# Altium PCB Copy of RA6M1.PcbDoc
Units mil, origin at the board's own origin, x right, y up, seen from the top; angles counter-clockwise.
Board outline 3150 x 4921 mil, 2 copper layers (Top Layer, Bottom Layer); 73 components, 111 nets, 520 pads, 75 vias.
Unrouted connection lines stored in the file: 143.
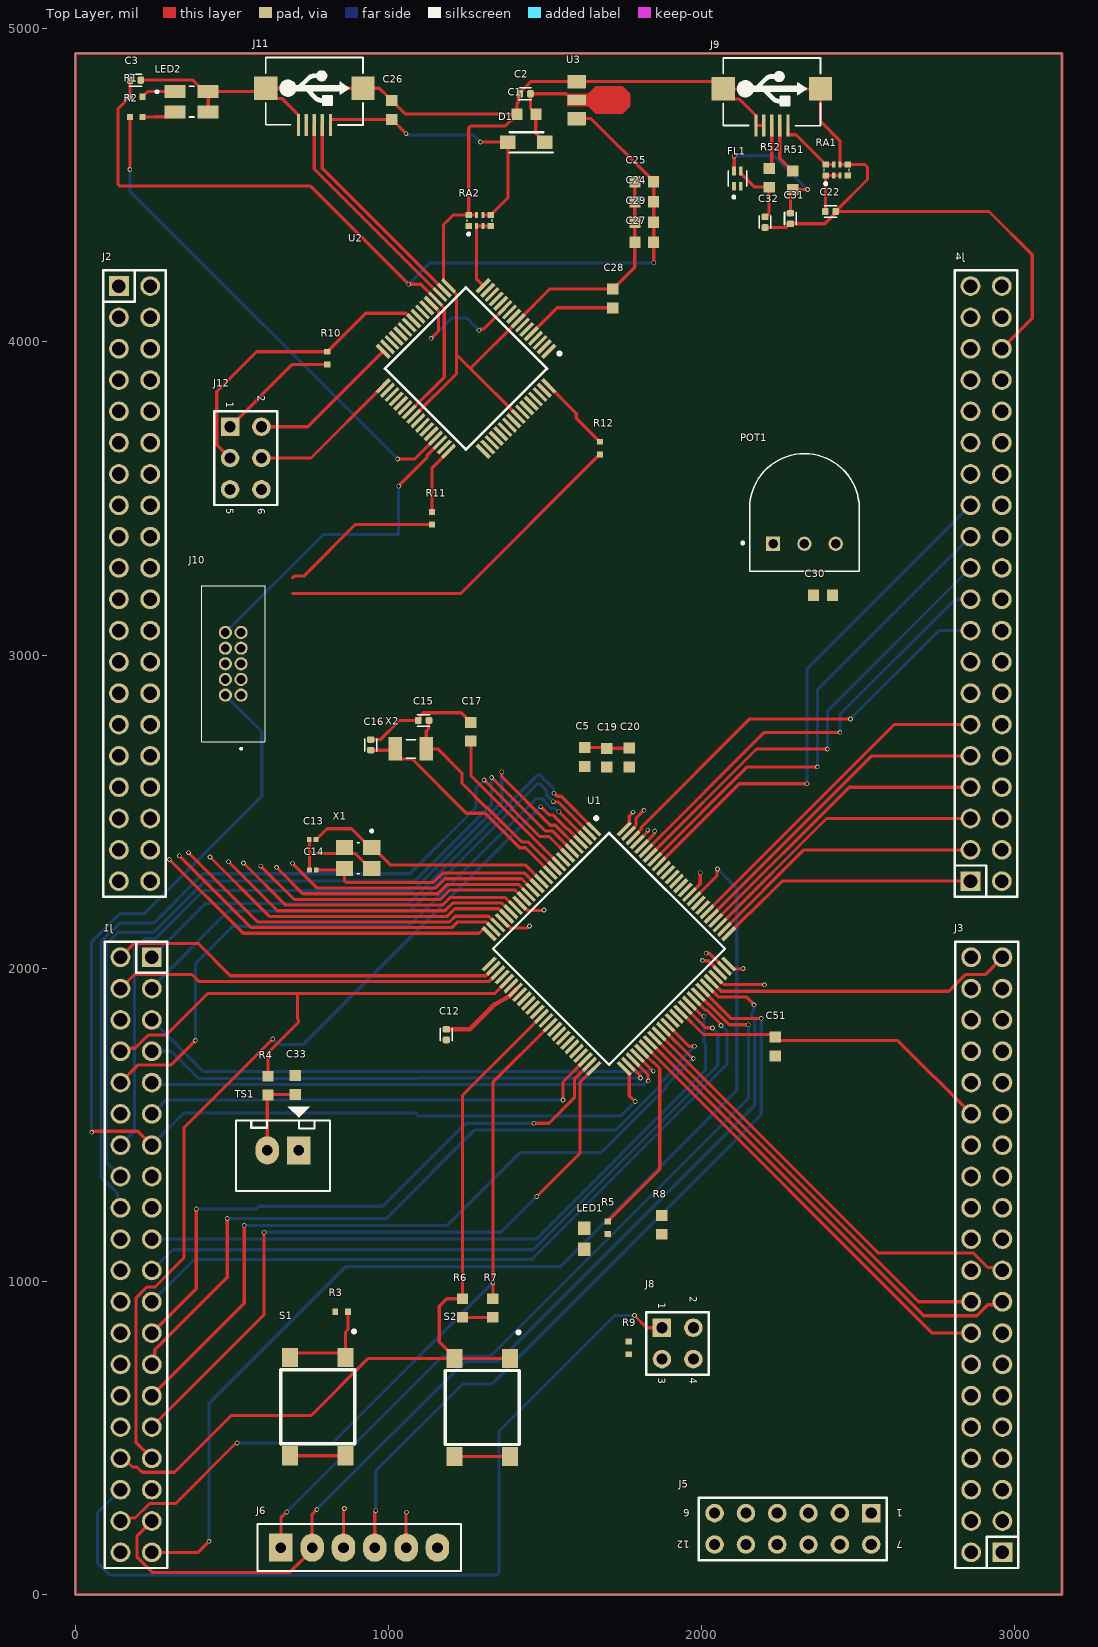
[diagram p0: Top Layer view]
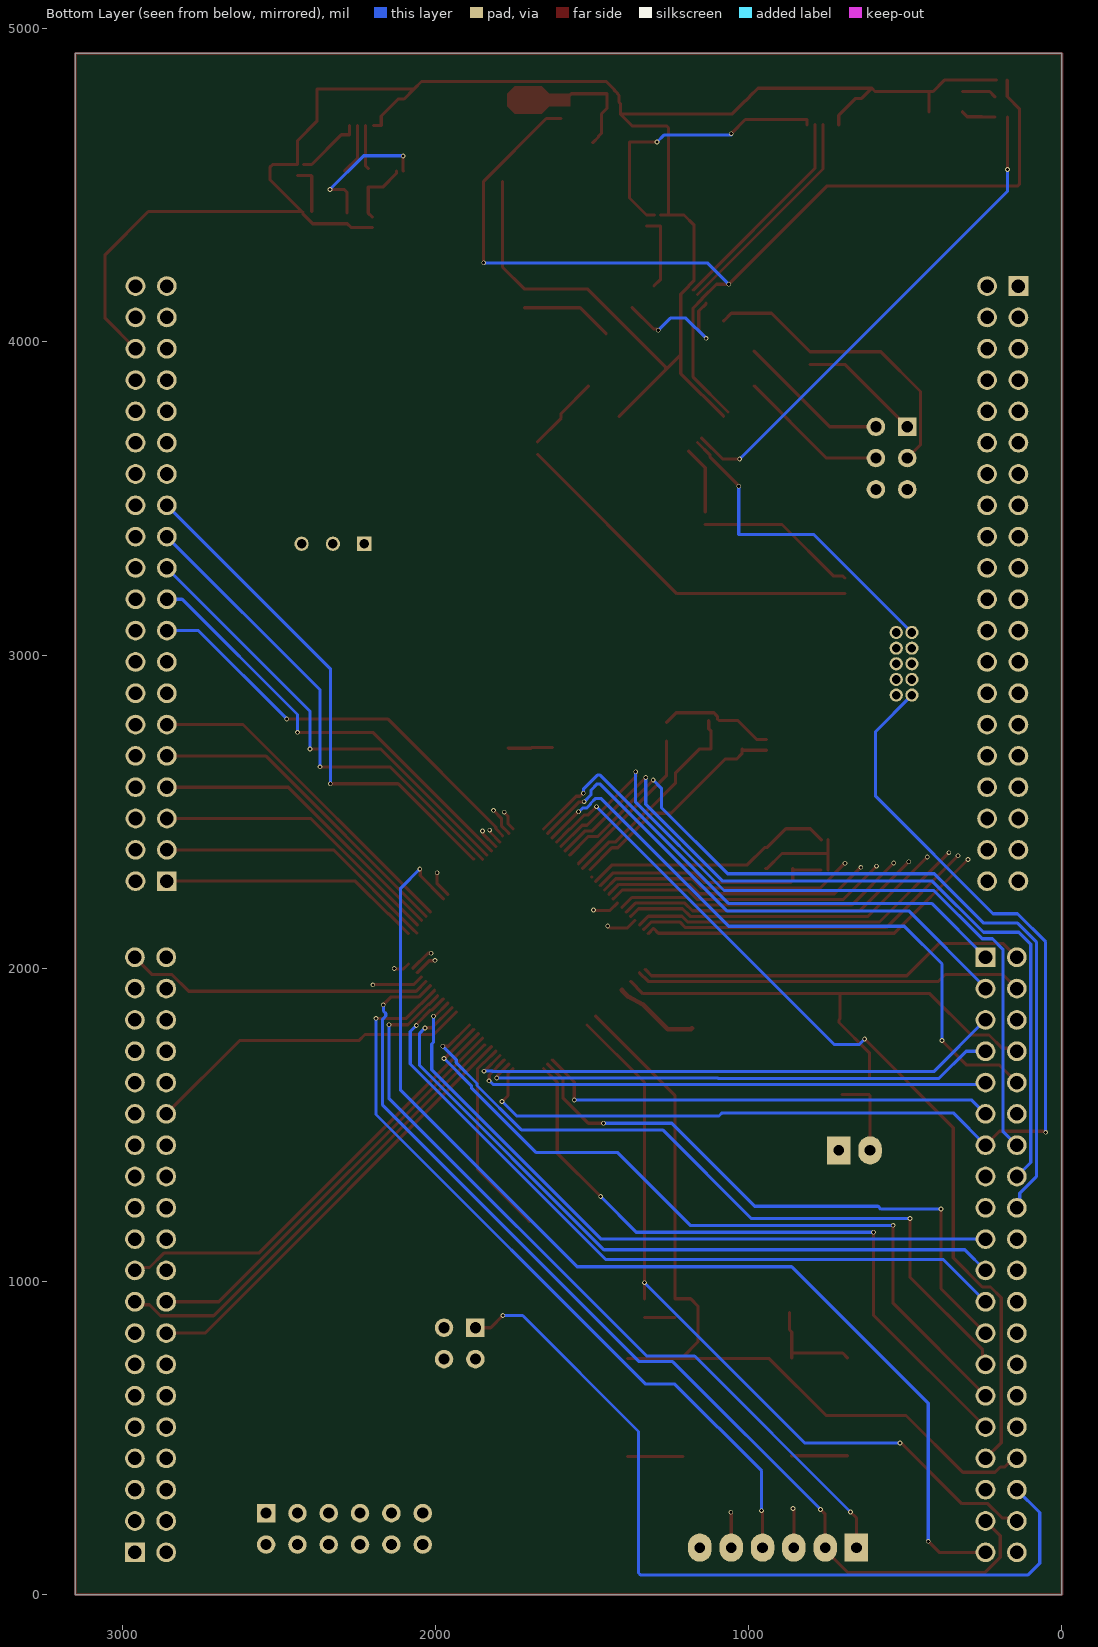
[diagram p1: Bottom Layer view, seen from below]

## Layer stack, top to bottom
Top Solder: solder mask 0.4, Solder Resist, Dk 3.5
Top Layer: signal copper 1.4
Dielectric 1: dielectric 12.6, FR-4, Dk 4.8
Bottom Layer: signal copper 1.4
Bottom Solder: solder mask 0.4, Solder Resist, Dk 3.5

## Board outline
0,0 0,4921 3150,4921 3150,0

## Design rules (kind name [scope] priority, off if disabled: settings)
Clearance [All] p1: gap=8 ignorepadtopadclearanceinfootprint=FALSE
PolygonConnect [All] p1: connectstyle=Relief reliefconductorwidth=10 reliefentries=4 polygonreliefangle="90 Angle" airgapwidth=10
RoomDefinition RA6M1 [InComponentClass('RA6M1')] p1: confinementstyle=ConfineIn formatcopy=TRUE lockcomponents=FALSE outline -1001,-1001 999,-1001 999,-1 -1001,-1
RoutingVias [All] p1: holewidth=28 width=50 viastyle="Through Hole" minholewidth=10 minwidth=15 maxholewidth=15 maxwidth=30
SolderMaskExpansion [All] p1: expansion=4 istentingtop=FALSE
Width [All] p1: maxlimit=30 minlimit=10 preferedwidth=15
30 further rules are at their usual default settings.

## Components (designator, comment, footprint, x,y, rotation, side; value= is the part's Value field where it differs from the comment)
C1 "0.1uF/50V/0603" CAPC1608X90N 1440,4727 r0 top
C2 "1UF/16V/0402" CAPC1005X55N 1436,4792 r180 top
C3 "1UF/16V/0402" CAPC1005X55N 192.22,4835.44 r0 top
C4 "4.7uF/50V/0603" CAPC1608X90N 3602,2530.24 r180 top
C5 "0.1uF/50V/0603" CAPC1608X90N 1627,2674 r270 top
C7 "0.1uF/50V/0603" CAPC1608X90N 3602,2452.05 r180 top
C8 "0.1uF/50V/0603" CAPC1608X90N 3602,2608.42 r180 top
C11 "0.1uF/50V/0603" CAPC1608X90N 3602,2764.8 r180 top
C12 "0.01uF/50V/0402" CAPC1005X55N 1184.47,1787.93 r270 top
C13 "10pF/25V/0201" RESC0603X26N 757.49,2410.4 r0 top
C14 "10pF/25V/0201" RESC0603X26N 758.46,2313.4 r0 top
C15 "12pF/50V/0402" CAPC1005X55N 1112,2791 r180 top
C16 "12pF/50V/0402" CAPC1005X55N 943,2713 r90 top
C17 "0.1uF/50V/0603" CAPC1608X90N 1263,2755 r270 top
C18 "0.1uF/50V/0603" CAPC1608X90N 3602,2686.61 r180 top
C19 "4.7uF/6.3V/0603" CAPC1608X90N 1696,2672 r270 top
C20 "4.7uF/6.3V/0603" CAPC1608X90N 1768,2673 r270 top
C21 "0.1uF/50V/0603" CAPC1608X90N 3602,2139.31 r180 top
C22 "1uF/16V/0402" CAPC1005X55N 2411,4416 r0 top
C23 "0.1uF/50V/0603" CAPC1608X90N 3602,2217.49 r180 top
C24 "0.1uF/50V/0603" CAPC1608X90N 1816.48,4447.08 r0 top
C25 "0.1uF/50V/0603" CAPC1608X90N 1816.48,4511.69 r0 top
C26 "0.1uF/50V/0603" CAPC1608X90N 1010,4740 r270 top
C27 "0.1uF/50V/0603" CAPC1608X90N 1816.48,4317.85 r0 top
C28 "4.7uF6.3V/0603" CAPC1608X90N 1716,4139 r90 top
C29 "0.1uF/50V/0603" CAPC1608X90N 1816.48,4382.46 r0 top
C30 "0.1UF/50V/0603" CAPC1608X90N 2387,3191 r180 top
C31 "47pF/50V/402" CAPC1005X55N 2283,4394 r270 top
C32 "47pF/50V/402" CAPC1005X55N 2202,4382 r270 top
C33 "18pF/50V/0603" CAPC1608X90N 701.98,1627.17 r270 top
C50 "0.1uF/50V/0603" CAPC1608X90N 3602,2295.68 r180 top
C51 "0.1uF/50V/0603" CAPC1608X90N 2234,1750 r90 top
C53 "0.1uF/50V/0603" CAPC1608X90N 3602,2373.87 r180 top
D1 "40V/1A" SODFL3616X98N 1440,4637 r180 top
FL1 "DLP11SN201HL2L" FIL_DLP11SN201HL2L 2114,4521 r90 top
J1 "JP 2x20 2.54" "JP 2x20 DT"#1 194,1085 r270 top
J2 "JP 2x20 2.54" "JP 2x20 DT"#2 189,3228 r270 top
J3 "JP 2x20 2.54" "JP 2x20 DT"#2 2910,1085 r90 top
J4 "JP 2x20 2.54" "JP 2x20 DT"#1 2908,3228 r90 top
J5 "Header 6X2A" HDR2X6_CEN 2541,260 r180 top
J6 "JP6" jam6 656,150 r180 top value="Connector 6"
J8 "JP2x2" HDR2X2 1873,852 r270 top
J9 "USB Micro 5p SMD" "USB Micro 5p SMD" 2223.59,4691 r0 top
J10 "3220-10-0100-00" 322010010000 529,2872 r90 top
J11 "USB Micro 5p SMD" "USB Micro 5p SMD" 762.82,4693 r0 top
J12 "HEAD 3x2" HDR2X3 494,3729 r270 top value="Connector 3x2"
LED1 "LED/0603" 0603 1625,1135.72 r270 top
LED2 "LED/1210" LED_597-7701-507F 371,4767 r0 top
POT1 "10K0" TRIM_3352T-1-103LF 2327.72,3468.05 r0 top
R1 "470R/0.5%/0402" RES_ERA2AED472X 194.15,4782.52 r0 top
R2 "1.5K/0.5%/0402" RES_ERA2AED472X 194.15,4717.52 r0 top
R3 "47K0/1%/0402" RES_ERA2AED472X 849.84,903 r180 top
R4 "560R0/1%/0603" RESC1508X55N 615,1625.15 r270 top
R5 "470R/0.5%/0402" RES_ERA2AED472X 1700,1171.72 r270 top
R6 "10K/1%/0603" RESC1508X55N 1236,914.92 r270 top
R7 "10K/1%/0603" RESC1508X55N 1333,914.92 r270 top
R8 "10K2/1%/0603" RESC1508X55N 1872,1180.72 r90 top
R9 "1K50/0.5%/0402" RES_ERA2AED472X 1767,787.84 r270 top
R10 "4.7K/0.5%/0402" RES_ERA2AED472X 804,3948.16 r270 top
R11 "150R/1%/0402" RES_ERA2AED472X 1139,3437 r270 top
R12 "150R/1%/0402" RES_ERA2AED472X 1675,3661 r90 top
R51 "27R0/1%/0603" RESC1508X55N 2291,4516 r90 top
R52 "27R0/1%/0603" RESC1508X55N 2215,4523.55 r90 top
RA1 "30K0/0402" EXB28V510JX 2431.16,4548.28 r0 top
RA2 "30K0/0402" EXB28V510JX 1291.04,4387.28 r0 top
S1 "Switch" PTS645(SMT) 774,600 r270 top
S2 "Switch" PTS645(SMT) 1299,597 r270 top
TS1 "CON" CON2 712.79,1418.5 r180 top
U1 "R7FA6M1AD3CFP#AA0" QFP50P1600X1600X170-100N 1703.9,2062.07 r315 top
U2 "R7FS124773A01CFM#AA1" QFP50P1200X1200X170-64N 1247,3914.71 r225 top
U3 "AP7215-33YG-13" SOT150P400X160-3N 1671,4772 r270 top
X1 "12MHZ" XTAL_ABM8G-12.000MHZ-B4Y-T 902.69,2351.54 r270 top
X2 "32.768KHZ" XTAL_ABS07-32.768KHZ-T 1071,2700.48 r180 top

## Footprints (in the part's own frame and the unit in brackets; to place one, negate y for a bottom-side part, rotate by r counter-clockwise, add the part's x,y. Pads: shape width x height; smd on the part's side, far side on the other; paste and mask are expansions set on the pad)
0603 [mm]
  rect 1.1x1 smd: 1(-0.85,0) 2(0.85,0)
  body extent -0.8,-0.38 0.8,0.42, height 0.8
322010010000 [mm]
  round 1.07 hole 0.7: 1(0,0) 2(0,1.27) 3(1.27,0) 4(1.27,1.27) 5(2.54,0) 6(2.54,1.27) 7(3.81,0) 8(3.81,1.27) 9(5.08,0) 10(5.08,1.27)
  silkscreen extent -4.4,-1.91 8.86,3.18, body extent -3.78,-1.91 8.87,3.19, height 5.7
CAPC1005X55N [mm]
  rrect53% 0.54x0.6 smd: 1(-0.43,0) 2(0.43,0)
  silkscreen extent -0.5,-0.48 0.5,0.48, body extent -0.5,-0.25 0.5,0.25, height 0.55
CAPC1608X90N [mm]
  rect 0.89x0.93 smd: 1(-0.77,0) 2(0.762,0)
  body extent -0.8,-0.42 0.8,0.38, height 0.9
CON2 [mil]
  rect 75x90 hole 34: 1(0,0)
  oval 75x90 hole 34: 2(100,0)
  silkscreen extent -100,-140 200,130, body extent -95,-93 196,133, height 281
EXB28V510JX [mm]
  rect 0.525x0.5 smd: 1(-0.888,-0.45) 4(0.888,-0.45) 5(0.888,0.45) 8(-0.888,0.45)
  rect 0.25x0.5 smd: 2(-0.25,-0.45) 3(0.25,-0.45) 6(0.25,0.45) 7(-0.25,0.45)
  silkscreen extent -1,-1.2 1,0.1, body extent -1,-0.5 1,0.5, height 0.36
FIL_DLP11SN201HL2L [mm]
  rect 0.7x0.3 smd: 1(-0.625,0.275) 2(0.625,0.275) 3(0.625,-0.275) 4(-0.625,-0.275)
  silkscreen extent -1.6,-0.74 0.63,0.74, body extent -0.63,-0.5 0.62,0.5, height 0.92
HDR2X2 [mm] "Connector; Header; 2x2 Position"
  rect 1.5x1.5 hole 0.9: 1(0,0)
  round 1.5 hole 0.9: 2(0,2.54) 3(2.54,0) 4(2.54,2.54)
  silkscreen extent -1.27,-1.27 3.81,3.81, body extent -1.27,-1.26 3.81,3.82, height 8.77
HDR2X3 [mm] "Connector; Header; 3x2 Position"
  rect 1.5x1.5 hole 0.9: 1(0,0)
  round 1.5 hole 0.9: 2(0,2.54) 3(2.54,0) 4(2.54,2.54) 5(5.08,0) 6(5.08,2.54)
  silkscreen extent -1.27,-1.27 6.35,3.81, body extent -1.27,-1.27 6.35,3.81, height 8.77
HDR2X6_CEN [mm] "Connector; Header; 6x2 Position"
  rect 1.5x1.5 hole 0.9: 1(0,0)
  round 1.5 hole 0.9: 2(2.54,0) 3(5.08,0) 4(7.62,0) 5(10.16,0) 6(12.7,0) 7(0,2.54) 8(2.54,2.54) 9(5.08,2.54) 10(7.62,2.54) 11(10.16,2.54) 12(12.7,2.54)
  silkscreen extent -1.27,-1.27 13.97,3.81, body extent -1.27,-1.27 13.97,3.81, height 1.5
jam6 [mil]
  rect 75x90 hole 34: 1(0,0)
  oval 75x90 hole 34: 2(-100,0) 3(-200,0) 4(-300,0) 5(-400,0) 6(-500,0)
  silkscreen extent -575,-75 75,75, body extent -550,-51 50,49, height 704
"JP 2x20 DT"#1 [mm] "40 pins, dual pin, straight, gold plating"
  rect 1.6x1.6 hole 1.1: 1(-24.13,1.27)
  round 1.6 hole 1.1: 2(-21.59,1.27) 3(-19.05,1.27) 4(-16.51,1.27) 5(-13.97,1.27) 6(-11.43,1.27) 7(-8.89,1.27) 8(-6.35,1.27) 9(-3.81,1.27) 10(-1.27,1.27) 11(1.27,1.27) 12(3.81,1.27) 13(6.35,1.27) 14(8.89,1.27) 15(11.43,1.27) 16(13.97,1.27) 17(16.51,1.27) 18(19.05,1.27) 19(21.59,1.27) 20(24.13,1.27) 21(24.13,-1.27) 22(21.59,-1.27) 23(19.05,-1.27) 24(16.51,-1.27) 25(13.97,-1.27) 26(11.43,-1.27) 27(8.89,-1.27) 28(6.35,-1.27) 29(3.81,-1.27) 30(1.27,-1.27) 31(-1.27,-1.27) 32(-3.81,-1.27) 33(-6.35,-1.27) 34(-8.89,-1.27) 35(-11.43,-1.27) 36(-13.97,-1.27) 37(-16.51,-1.27) 38(-19.05,-1.27) 39(-21.59,-1.27) 40(-24.13,-1.27)
  silkscreen extent -25.4,-2.54 25.4,2.54, body extent -25.4,-2.54 25.4,2.54, height 5.55
"JP 2x20 DT"#2 [mm] "40 pins, dual pin, straight, gold plating"
  rect 1.6x1.6 hole 1.1: 1(-24.13,-1.27)
  round 1.6 hole 1.1: 2(-21.59,-1.27) 3(-19.05,-1.27) 4(-16.51,-1.27) 5(-13.97,-1.27) 6(-11.43,-1.27) 7(-8.89,-1.27) 8(-6.35,-1.27) 9(-3.81,-1.27) 10(-1.27,-1.27) 11(1.27,-1.27) 12(3.81,-1.27) 13(6.35,-1.27) 14(8.89,-1.27) 15(11.43,-1.27) 16(13.97,-1.27) 17(16.51,-1.27) 18(19.05,-1.27) 19(21.59,-1.27) 20(24.13,-1.27) 21(24.13,1.27) 22(21.59,1.27) 23(19.05,1.27) 24(16.51,1.27) 25(13.97,1.27) 26(11.43,1.27) 27(8.89,1.27) 28(6.35,1.27) 29(3.81,1.27) 30(1.27,1.27) 31(-1.27,1.27) 32(-3.81,1.27) 33(-6.35,1.27) 34(-8.89,1.27) 35(-11.43,1.27) 36(-13.97,1.27) 37(-16.51,1.27) 38(-19.05,1.27) 39(-21.59,1.27) 40(-24.13,1.27)
  silkscreen extent -25.4,-2.54 25.4,2.54, body extent -25.4,-2.54 25.4,2.54, height 8.55
LED_597-7701-507F [mm]
  rect 1.7x1.05 smd: 1(-1.35,0.825) 2(1.35,0.825) 3(-1.35,-0.825) 4(1.35,-0.825)
  silkscreen extent -2.9,-1.25 0.2,1.25, body extent -1.6,-1.35 1.6,1.35, height 0.9
PTS645(SMT) [mm]
  rect 1.55x1.3 smd: 1(-3.975,2.25) 2(3.975,2.25) 3(-3.975,-2.25) 4(3.975,-2.25)
  silkscreen extent -6.23,-3 3,3.06, body extent -4.5,-3 4.5,3, height 4.3
QFP50P1200X1200X170-64N [mm]
  rect 1.475x0.3 smd: 1(-5.738,3.75) 2(-5.738,3.25) 3(-5.738,2.75) 4(-5.738,2.25) 5(-5.738,1.75) 6(-5.738,1.25) 7(-5.738,0.75) 8(-5.738,0.25) 9(-5.738,-0.25) 10(-5.738,-0.75) 11(-5.738,-1.25) 12(-5.738,-1.75) 13(-5.738,-2.25) 14(-5.738,-2.75) 15(-5.738,-3.25) 16(-5.738,-3.75) 33(5.738,-3.75) 34(5.738,-3.25) 35(5.738,-2.75) 36(5.738,-2.25) 37(5.738,-1.75) 38(5.738,-1.25) 39(5.738,-0.75) 40(5.738,-0.25) 41(5.738,0.25) 42(5.738,0.75) 43(5.738,1.25) 44(5.738,1.75) 45(5.738,2.25) 46(5.738,2.75) 47(5.738,3.25) 48(5.738,3.75)
  rect 0.3x1.475 smd: 17(-3.75,-5.738) 18(-3.25,-5.738) 19(-2.75,-5.738) 20(-2.25,-5.738) 21(-1.75,-5.738) 22(-1.25,-5.738) 23(-0.75,-5.738) 24(-0.25,-5.738) 25(0.25,-5.738) 26(0.75,-5.738) 27(1.25,-5.738) 28(1.75,-5.738) 29(2.25,-5.738) 30(2.75,-5.738) 31(3.25,-5.738) 32(3.75,-5.738) 49(3.75,5.738) 50(3.25,5.738) 51(2.75,5.738) 52(2.25,5.738) 53(1.75,5.738) 54(1.25,5.738) 55(0.75,5.738) 56(0.25,5.738) 57(-0.25,5.738) 58(-0.75,5.738) 59(-1.25,5.738) 60(-1.75,5.738) 61(-2.25,5.738) 62(-2.75,5.738) 63(-3.25,5.738) 64(-3.75,5.738)
  silkscreen extent -6.35,-4.65 4.65,4.65, body extent -6,-6 6,6, height 1.7
QFP50P1600X1600X170-100N [mm]
  rect 1.475x0.3 smd: 1(-7.738,6) 2(-7.738,5.5) 3(-7.738,5) 4(-7.738,4.5) 5(-7.738,4) 6(-7.738,3.5) 7(-7.738,3) 8(-7.738,2.5) 9(-7.738,2) 10(-7.738,1.5) 11(-7.738,1) 12(-7.738,0.5) 13(-7.738,0) 14(-7.738,-0.5) 15(-7.738,-1) 16(-7.738,-1.5) 17(-7.738,-2) 18(-7.738,-2.5) 19(-7.738,-3) 20(-7.738,-3.5) 21(-7.738,-4) 22(-7.738,-4.5) 23(-7.738,-5) 24(-7.738,-5.5) 25(-7.738,-6) 51(7.738,-6) 52(7.738,-5.5) 53(7.738,-5) 54(7.738,-4.5) 55(7.738,-4) 56(7.738,-3.5) 57(7.738,-3) 58(7.738,-2.5) 59(7.738,-2) 60(7.738,-1.5) 61(7.738,-1) 62(7.738,-0.5) 63(7.738,0) 64(7.738,0.5) 65(7.738,1) 66(7.738,1.5) 67(7.738,2) 68(7.738,2.5) 69(7.738,3) 70(7.738,3.5) 71(7.738,4) 72(7.738,4.5) 73(7.738,5) 74(7.738,5.5) 75(7.738,6)
  rect 0.3x1.475 smd: 26(-6,-7.738) 27(-5.5,-7.738) 28(-5,-7.738) 29(-4.5,-7.738) 30(-4,-7.738) 31(-3.5,-7.738) 32(-3,-7.738) 33(-2.5,-7.738) 34(-2,-7.738) 35(-1.5,-7.738) 36(-1,-7.738) 37(-0.5,-7.738) 38(0,-7.738) 39(0.5,-7.738) 40(1,-7.738) 41(1.5,-7.738) 42(2,-7.738) 43(2.5,-7.738) 44(3,-7.738) 45(3.5,-7.738) 46(4,-7.738) 47(4.5,-7.738) 48(5,-7.738) 49(5.5,-7.738) 50(6,-7.738) 76(6,7.738) 77(5.5,7.738) 78(5,7.738) 79(4.5,7.738) 80(4,7.738) 81(3.5,7.738) 82(3,7.738) 83(2.5,7.738) 84(2,7.738) 85(1.5,7.738) 86(1,7.738) 87(0.5,7.738) 88(0,7.738) 89(-0.5,7.738) 90(-1,7.738) 91(-1.5,7.738) 92(-2,7.738) 93(-2.5,7.738) 94(-3,7.738) 95(-3.5,7.738) 96(-4,7.738) 97(-4.5,7.738) 98(-5,7.738) 99(-5.5,7.738) 100(-6,7.738)
  silkscreen extent -8.35,-6.65 6.65,6.87, body extent -8,-8 8,8, height 1.7
RES_ERA2AED472X [mm]
  rect 0.475x0.5 smd: 1(-0.512,0) 2(0.512,0)
  body extent -0.5,-0.25 0.5,0.25, height 0.35
RESC0603X26N [mm]
  rrect25% 0.38x0.4 smd: 1(-0.28,0)
  rect 0.38x0.4 smd: 2(0.28,0)
  body extent -0.3,-0.15 0.3,0.15, height 0.32
RESC1508X55N [mm]
  rect 0.87x0.93 smd: 1(-0.755,0) 2(0.755,0)
  body extent -0.77,-0.4 0.78,0.4, height 0.55
SODFL3616X98N [mm]
  rect 1.24x1.12 smd: 1(-1.5,0) 2(1.5,0)
  silkscreen extent -2.12,-0.82 1.35,0.82, body extent -1.8,-0.82 1.8,0.83, height 0.98
SOT150P400X160-3N [mm]
  rrect3% 1.1x1.5 smd paste-2 mask+0: 1(-1.5,-1.8) 3(1.5,-1.8)
  rrect3% 0.8x1.5 smd paste-2 mask+0: 2(0,-1.8)
  Top Layer region: 1.1,1.95 1.1,-0.25 0.5,-0.85 0.5,-2.55 -0.5,-2.55 -0.5,-0.85 -1.1,-0.25 -1.1,1.95 -0.5,2.55 0.5,2.55
  body extent -2.25,-2.3 2.25,1.79, height 1.6
TRIM_3352T-1-103LF [mm]
  rect 1.16x1.16 hole 0.76: 1(-2.54,-2.87)
  round 1.16 hole 0.76: 2(0,-2.87) 3(2.54,-2.87)
  silkscreen extent -5.1,-5.08 4.44,4.44, body extent -4.44,-5.08 4.44,4.44, height 4.32
"USB Micro 5p SMD" [mil]
  rect 10x70 smd: 1(51.18,0) 2(25.59,0) 3(0,0) 4(-25.59,0) 5(-50,0)
  rect 74.8x74.8 smd: 5(-155.51,116.84) 5(155.51,116.84)
  silkscreen extent -155,-1 155,215, body extent -157,5 158,218, height 107
XTAL_ABM8G-12.000MHZ-B4Y-T [mm]
  rect 1.2x1.4 smd: 1(-0.85,1.1) 2(-0.85,-1.1) 3(0.85,-1.1) 4(0.85,1.1)
  silkscreen extent -2.3,-0.08 1.25,1.2, body extent -1.6,-1.24 1.6,1.24, height 0.99
XTAL_ABS07-32.768KHZ-T [mm]
  rect 1.1x1.9 smd: 1(-1.25,0) 2(1.25,0)
  silkscreen extent -0.38,-0.75 0.38,0.75, body extent -1.6,-0.75 1.6,0.75, height 0.89

## Part data
C1 C4 C5 C7 C8 C11 C17 C18 C19 C20 C21 C23 C24 C25 C26 C27 C28 C29 C30 C33 C50 C51 C53: library part CL10B104KB8NNNC, "0.1ÂµF Â±10% 50V Ceramic Capacitor X7R 0603 _1608 Metric_", Package="0603 Samsung", Availability=Unavailable, MF="Samsung Electro-Mechanics", MP=CL10B104KB8NNNC, Price=None, SnapEDA_Link=https://www.snapeda.com/parts/CL10B104KB8NNNC/Samsung%20Electro-Mechanics/view-part/3598309/?ref=snap
C2 C3 C12 C15 C16 C22 C31 C32: library part CL05A105KO5NNNC, "1ÂµF Â±10% 16V Ceramic Capacitor X5R 0402 (1005 Metric)", Package="0402 Samsung", Availability=Good, Check_prices=https://www.snapeda.com/parts/CL05A105KO5NNNC/Samsung%20Electro-Mechanics/view-part/3598151/?ref=eda, MF="Samsung Electro-Mechanics", MP=CL05A105KO5NNNC, Price=None, Purchase-URL=https://pricing.snapeda.com/search/part/CL05A105KO5NNNC/?ref=eda, SnapEDA_Link=https://www.snapeda.com/parts/CL05A105KO5NNNC/Samsung%20Electro-Mechanics/view-part/3598151/?ref=snap
C13 C14: library part RESC0603X26N, "TU0201", Package="0603 Samsung", Availability=Unavailable, MF="Samsung Electro-Mechanics", MP=CL10B104KB8NNNC, Price=None, SnapEDA_Link=https://www.snapeda.com/parts/CL10B104KB8NNNC/Samsung%20Electro-Mechanics/view-part/3598309/?ref=snap
D1: library part MBR140SFT1G, "Diode Schottky 40V 1A SOD-123FL ON Semiconductor MBR140SFT1G Schottky Diode, 1A, 40V, 2-Pin SOD-123FL", Manufacturer_Name=onsemi, Mouser Part Number=863-MBR140SFT1G, Arrow Part Number=MBR140SFT1G, Arrow Price/Stock=https://www.arrow.com/en/products/mbr140sft1g/on-semiconductor?region=nac, Datasheet Link=http://www.onsemi.com/pub/Collateral/MBR140SFT1-D.PDF, Geometry.Height=0.98mm, Manufacturer_Part_Number=MBR140SFT1G, Mouser Price/Stock=https://www.mouser.co.uk/ProductDetail/onsemi/MBR140SFT1G?qs=3JMERSakebrc0eIUjXPasA%3D%3D
FL1: "2 Line Common Mode Choke Surface Mount 200 Ohms @ 100MHz 110mA DCR 3.88Ohm", Package="1210 Murata", Availability=Unavailable, DigiKey-Purchase-URL=https://snapeda.com/shop?store=DigiKey&id=4300877, MF=Murata, MP=DLP11SN201HL2L, Price=None, SnapEDA_Link=https://www.snapeda.com/parts/DLP11SN201HL2L/Murata/view-part/4300877/?ref=snap
J1 J2 J3 J4: library part "JP 2x20 2.54 Duc Thang", "Cắm", Chung_Loai=Cắm, Don_Vi=Con, Ma_Hang=MH002686, Ten_Linh_Kien="Jump Đôi Đực 2.54MM 2x40P Thẳng 11MM"
J5: "Header, 6-Pin, Dual row", LatestRevisionDate=17-Jul-2002, LatestRevisionNote="Re-released for DXP Platform.", Publisher="Altium Limited"
J6: library part "jam 6", "jam 6"
J9 J11: "USB Type B", Ma_Hang=MH001020, Ten="MicroUSB MK5P SMD"
J10: "Conn Shrouded Header (4 Sides) HDR 10 POS 1.27mm Solder ST Thru-Hole", Manufacturer_Name="CNC Tech", Arrow Part Number=3220-10-0100-00, Arrow Price/Stock=https://www.arrow.com/en/products/3220-10-0100-00/cnc-tech-llc?region=nac, Datasheet Link=https://datasheet.datasheetarchive.com/originals/dk/DKDS-7/133059.pdf, Geometry.Height=5.6mm, Manufacturer_Part_Number=3220-10-0100-00
J12: library part JP3x2, "Connector 3x2"
LED1: library part LTST-C191KRKT, "http://octopart.com/ltst-c190krkt-lite-on-549893", Package=None, Availability=Unavailable, MP=LTST-C191KRKT, Price=None
LED2: library part 598-8610-207F, "Standard LEDs - SMD Red/Green WC 80/50mcd 645/570nm", Manufacturer_Name=Dialight, Mouser Part Number=645-598-8610-207F, Arrow Part Number=598-8610-207F, Arrow Price/Stock=https://www.arrow.com/en/products/598-8610-207f/dialight?region=nac, Datasheet Link=https://media.digikey.com/pdf/Data%20Sheets/Dialight%20PDFs/598%20Series%201210%20Pkg%20Bi-Color.pdf, Geometry.Height=0.8mm, Manufacturer_Part_Number=598-8610-207F, Mouser Price/Stock=https://www.mouser.co.uk/ProductDetail/Dialight/598-8610-207F?qs=7JStj%2FjQ2SFuCjosqwklHQ%3D%3D
POT1: library part 3352T-1-103LF, "10 kOhms 0.5W, 1/2W Through Hole Thumbwheel Potentiometer Top Adjustment", Package="3352T-3 Bourns", Availability="In Stock", Check_prices=https://www.snapeda.com/parts/3352T-1-103LF/Bourns/view-part/?ref=eda, MF=Bourns, MP=3352T-1-103LF, Price=None, Purchase-URL=https://pricing.snapeda.com/search/part/3352T-1-103LF/?ref=eda, SnapEDA_Link=https://www.snapeda.com/parts/3352T-1-103LF/Bourns/view-part/?ref=snap
R1 R2 R3 R5 R9 R10 R11 R12: library part ERA2AED472X, "Res Thin Film 0402 4.7K Ohm 0.5% 0.063W(1/16W) 25ppm/C Molded SMD Automotive Punched T/R", Package="1005-2 Panasonic", Availability="In Stock", Check_prices=https://www.snapeda.com/parts/ERA-2AED472X/Panasonic+Electronic+Components/view-part/?ref=eda, MF="Panasonic Electronic", MP=ERA-2AED472X, Price=None, Purchase-URL=https://pricing.snapeda.com/search/part/ERA-2AED472X/?ref=eda, SnapEDA_Link=https://www.snapeda.com/parts/ERA-2AED472X/Panasonic+Electronic+Components/view-part/?ref=snap
R4 R6 R7 R8 R51 R52: library part RMCF0603JT27R0, Package=None, Availability=Unavailable, MP=RMCF0603JT27R0, Price=None
RA1 RA2: library part EXB28V303JX, "Resistor Networks & Arrays Resistor ArrayChip 0804 4 elements", Manufacturer_Name=Panasonic, Datasheet Link=https://industrial.panasonic.com/cdbs/www-data/pdf/AOC0000/AOC0000C14.pdf, Geometry.Height=0mm, Manufacturer_Part_Number=EXB28V303JX
S1 S2: library part PTS645SM43SMTR92LFS, "C & K COMPONENTS - PTS645SM43SMTR92LFS - SWITCH, SPST, 0.05A, 12VDC, SMD, 4.3MM", Manufacturer_Name="C & K COMPONENTS", Mouser Part Number=611-PTS645SM43SMTR92, Arrow Part Number=PTS645SM43SMTR92LFS, Arrow Price/Stock=https://www.arrow.com/en/products/pts645sm43smtr92lfs/ck, Datasheet Link=http://www.farnell.com/datasheets/1914518.pdf, Manufacturer_Part_Number=PTS645SM43SMTR92LFS, Mouser Price/Stock=https://www.mouser.co.uk/ProductDetail/CK/PTS645SM43SMTR92LFS?qs=FESYatJ8odKPktxv6ncfWg%3D%3D
TS1: library part Con2, "connector 2"
U1: "ARM Cortex-M4 RA6M1 Microcontroller IC 32-Bit 120MHz 512KB (512K x 8) FLASH 100-LFQFP (14x14)", Manufacturer_Name="Renesas Electronics", Mouser Part Number=968-7FA6M1AD3CFP#AA0, Datasheet Link=https://www.renesas.com/in/en/document/dst/renesas-ra6m1-group-datasheet, Geometry.Height=1.7mm, Manufacturer_Part_Number=R7FA6M1AD3CFP#AA0, Mouser Price/Stock=https://www.mouser.co.uk/ProductDetail/Renesas-Electronics/R7FA6M1AD3CFPAA0?qs=d0WKAl%252BL4KaRUVVllxsS6w%3D%3D
U2: "S124", Manufacturer_Name="Renesas Electronics", Mouser Part Number=968-124773A01CFM#AA1, Datasheet Link=https://www.renesas.com/en-us/doc/products/renesas-synergy/doc/r01ds0264eu0130-synergy-s124.pdf, Geometry.Height=1.7mm, Manufacturer_Part_Number=R7FS124773A01CFM#AA1, Mouser Price/Stock=https://www.mouser.co.uk/ProductDetail/Renesas-Electronics/R7FS124773A01CFMAA1?qs=wUXugUrL1qwGPed2E2%2FoEA%3D%3D
U3: "Linear Voltage Regulator IC 1 Output 600mA SOT-89-3", Package="SOT-89-3 Diodes Inc.", Availability=Unavailable, MF="Diodes Inc.", MP=AP7215-33YG-13, Price=None, SnapEDA_Link=https://www.snapeda.com/parts/AP7215-33YG-13/Diodes%20Inc./view-part/269921/?ref=snap
X1: library part ABM8G-12.000MHZ-B4Y-T, "12 MHz Â±30ppm Crystal 10pF 120 Ohms 4-SMD, No Lead", Package="SMD-4 Abracon", Availability="In Stock", Check_prices=https://www.snapeda.com/parts/ABM8G-12.000MHZ-B4Y-T/Abracon+LLC/view-part/?ref=eda, MF=Abracon, MP=ABM8G-12.000MHZ-B4Y-T, Price=None, Purchase-URL=https://pricing.snapeda.com/search/part/ABM8G-12.000MHZ-B4Y-T/?ref=eda, SnapEDA_Link=https://www.snapeda.com/parts/ABM8G-12.000MHZ-B4Y-T/Abracon+LLC/view-part/?ref=snap
X2: library part ABS07-32.768KHZ-T, "32.768 kHz Â±20ppm Crystal 12.5pF 70 kOhms 2-SMD, No Lead", Package="SMD-2 Abracon LLC", Availability="In Stock", Check_prices=https://www.snapeda.com/parts/ABS07-32.768KHZ-T/Abracon+LLC/view-part/?ref=eda, MF=Abracon, MP=ABS07-32.768KHZ-T, Price=None, Purchase-URL=https://pricing.snapeda.com/search/part/ABS07-32.768KHZ-T/?ref=eda, SnapEDA_Link=https://www.snapeda.com/parts/ABS07-32.768KHZ-T/Abracon+LLC/view-part/?ref=snap

## Via types
v1: diameter 15, hole 10, Top Layer to Bottom Layer, 75 vias

## Nets (pads, with @x,y where several pads share a name; then routed paths per layer and width w, separated by ;. In a path a pad name is that pad's centre, name@x,y a point inside that pad or via, vN(x,y) a via of type N, cw(c..) or ccw(c..) an arc to the next point about the centre after c; other vN are vias at no path point)
3V3: C3.1 C5.2 C19.2 C20.2 C24.2 C25.2 C27.2 C29.2 J2.15 J5.12 J6.6 J10.1 J12.1 POT1.1 R1.1 R10.2 U1.8 U2.20 U2.39 U3.3 | length 3725.6
  Top Layer w10: C3.1 174.64,4834.79 174.64,4783.17 R1.1 173.99,4782.03 136,4744.04 136,4502.86 141.86,4497 751,4497 v1(1064,4184) 1102.98,4184 U2.20 1149.9,4135.98 1177.77,4108.11 1177.77,3887.23 U2.39 ; J12.1 693,3928 R10.2 ; U3.3 1646.02,4712.94 1846.48,4512.48 C25.2 C24.2 C29.2 C27.2 v1(1846.48,4252.52)
  Bottom Layer w10: v1(1064,4184) 1132,4252 v1@1846.48,4252
3V3MCU: C4.2 C7.2 C8.2 C11.2 C18.2 C21.2 C23.2 C50.2 C53.2 J1.8 J1.38 J2.22 J2.25 J2.36 J4.14 J4.19 R3.2 R6.2 R7.2 R8.2 U1.15 U1.29 U1.46 U1.62 U1.82 U1.87 U1.88 U1.91 U2.56 | length 925
  Top Layer w10: v1(693,2335.2) 772.61,2255.59 1149.87,2255.59 1179.96,2285.67 1424.62,2285.67 U1.15 ; R6.2 R7.2
+5V_JUSB: C26.2 D1.2 J11.1 RA2.5 RA2.6 | length 892.4
  Top Layer w10: J11.1 814,4710 C26.2 1010.79,4710 v1(1056,4664.79) ; v1(1293,4638) 1379.94,4638 D1.2 1380.94,4459.45 1326.49,4405 RA2.5 RA2.6
  Bottom Layer w10: v1@1056,4660 1271,4660 v1(1293,4638)
AVSS0: C1.1 C2.2 C3.2 C5.1 C7.1 C8.1 C11.1 C12.2 C13.1 C14.1 C15.2 C16.2 C17.1 C18.1 C19.1 C20.1 C21.1 C22.2 C23.1 C24.1 C25.1 C26.1 C27.1 C28.2 C29.1 C30.1 C31.2 C32.2 C33.1 C50.1 C51.1 C53.1 J1.9 J2.23 J2.24 J2.35 J4.23 J4.27 J5.5 J5.6 J5.11 J6.5 J9.4 J9.5 J10.3 J10.5 J10.9 J11.5 J12.5 LED1.1 LED2.2 LED2.4 POT1.3 R9.1 RA1.5 RA1.6 RA2.7 RA2.8 S1.2 S1.4 S2.2 S2.4 U1.12 U1.26 U1.45 U1.83 U1.86 U1.89 U1.90 U2.8 U2.17 U2.40 U2.57 U3.1 X1.2 X1.4 | length 8331.3
  Top Layer w10: C3.2 375.39,4835.44 411.35,4799.48 LED2.2 ; LED2.4 LED2.2 ; S1.4 S1.2 ; J11.5@712.82,4693 712.82,4723 658.38,4777.44 639.71,4777.44 J11.5@607.31,4809.84 ; C13.1 746.95,2409.92 746.95,2366.38 746.95,2361.9 ; C14.1 746.95,2313.89 746.95,2361.9 ; C16.2 973.79,2729.93 1034.86,2791 C15.2 1100.31,2796.24 1100.31,2804.04 1105.3,2809.03 1105.3,2809.95 1111.16,2815.81 1231.72,2815.81 1262.21,2785.32 C17.1 ; X1.4 942.06,2318.07 893.76,2366.38 859.39,2366.38 751.42,2366.38 746.95,2361.9 ; J6.5 1056,262 v1(1057,263) ; U2.40 1217,3898.63 1217,3958.63 ; S2.4 S2.2 ; RA2.7 RA2.8 ; U2.57 1264.81,3910.81 ; U1.12@1501.3,2291.4 U1.12 ; C5.1 1694,2704.32 C19.1 1767,2702.32 C20.1 ; C25.1 C24.1 C29.1 C27.1 1786.17,4238.38 1716.79,4169 C28.2 1515.21,4169 U2.8 1264.81,3918.6 1264.81,3910.81 ; J9.4 2173.59,4691 2173.59,4721 2119.15,4775.44 2100.48,4775.44 J9.5@2068.08,4807.84 ; C32.2 2269.48,4365.07 2281.48,4377.07 C31.2 2392.67,4377.07 2422.69,4407.09 2422.69,4411.94 C22.2@2427.93,4417.18 ; J4.23 3055,4075 3055,4278 2917,4416 C22.2 C22.2@2427.93,4417.18 ; LED2.2 596.94,4799.48 J11.5@607.31,4809.84 ; J11.5@607.31,4809.84 918.33,4809.84 970.47,4809.84 996.69,4783.62 996.69,4782.83 1009.21,4770.31 C26.1 1010.79,4770.31 1054.1,4727 C1.1 ; 1217,3958.63 1264.81,3910.81 ; 1217,3958.63 1217,4152.4 1191.66,4177.74 U2.17 1175.3,4195.2 1175.3,4373.7 1206.6,4405 RA2.8 ; RA2.8 1256.08,4683.2 1261.94,4689.06 1372.53,4689.06 1409.68,4726.21 C1.1 ; C1.1 1409.68,4760.7 1414.18,4765.19 1414.18,4787.1 C2.2 1419.07,4793.52 1429.3,4803.75 1429.3,4805.9 1454.1,4830.69 1514.67,4830.69 1515.03,4831.06 U3.1 2044.87,4831.06 J9.5@2068.08,4807.84 ; J9.5@2068.08,4807.84 2379.1,4807.84 2379.1,4704.05 2441,4642.15 RA1.6 RA1.5 2520,4566 2529,4557 2529,4518.25 C22.2@2427.93,4417.18
JLED: R2.1 U2.45 | length 1594
  Top Layer w10: v1(173.99,4550.44) R2.1 ; v1(1029,3626) 1083.57,3626 U2.45
  Bottom Layer w10: v1(173.99,4550.44) 173.99,4481.01 v1(1029,3626)
JP108_SWDIO: J12.4 U2.33 | length 484.3
  Top Layer w10: J12.4 752.5,3629 U2.33
JP305_SWCLK: J12.2 U2.32 | length 488.7
  Top Layer w10: J12.2 741.81,3729 U2.32
JP407: RA2.2 RA2.3 RA2.4 U2.16 | length 244.3
  Top Layer w10: U2.16 1281.2,4199.99 RA2.2 RA2.3 RA2.4
JRES: J12.3 R10.1 U2.25 | length 972.2
  Top Layer w10: J12.3 451.47,3671.53 451.47,3841.47 578.32,3968.31 R10.1 804.49,3968.31 927.45,4091.28 1055.41,4091.28 1079.2,4067.49 U2.25
JUSB_N: J11.2 U2.18 | length 689.3
  Top Layer w10: J11.2 788.41,4554.25 U2.18
JUSB_P: J11.3 U2.19 | length 708.1
  Top Layer w10: J11.3 762.82,4552 U2.19
JVCC_1: U2.11 U2.21 | length 440.6
  Top Layer w10: v1(1135.98,4010.98) 1159.77,4034.77 1159.77,4098.28 1135.98,4122.06 U2.21 ; v1(1289,4037) 1292.83,4040.83 1303.52,4040.83 U2.11
  Bottom Layer w10: v1(1135.98,4010.98) 1200.69,4075.69 1250.29,4075.69 v1(1289,4037)
JVCL: C28.1 U2.5 | length 294.9
  Top Layer w10: U2.5 1538.41,4108.69 C28.1
NetC1_2: C1.2 C2.1 D1.1 U3.2 | length 331
  Top Layer w10: D1.1 1496.69,4637 1479.65,4654.05 1479.65,4656.41 1470,4666.06 C1.2 1470,4727.79 1452.93,4744.86 C2.1 1566.35,4792 1586.35,4772 U3.2
NetC31_1: C31.1 FL1.2 R51.1 | length 451
  Top Layer w10: FL1.2 2103.59,4546.02 v1(2103.59,4593.59) ; C31.1 2283,4478.28 R51.1 v1(2337.28,4486.28)
  Bottom Layer w10: v1@2104,4594 2229.55,4594 v1(2337.28,4486.28)
NetC32_1: C32.1 FL1.3 R52.1 | length 217
  Top Layer w10: FL1.3 2124.83,4537.73 2168.73,4493.83 R52.1 2215,4411.09 2202.84,4398.93 C32.1
NetJ8_2: J8.2 R8.1
NetJ8_3: J8.3 R9.2
NetJ9_1: J9.1 RA1.7 RA1.8 | length 215.9
  Top Layer w10: J9.1 2274.77,4661 2300.7,4661 2395.7,4566 RA1.8 RA1.7
NetJ9_2: J9.2 R51.2 | length 163.3
  Top Layer w10: J9.2 2249.18,4586.36 2289.82,4545.72 R51.2
NetJ9_3: J9.3 R52.2 | length 141.3
  Top Layer w10: R52.2 2223.59,4561.87 J9.3
NetLED1_2: LED1.2 R5.2
NetLED2_1: LED2.1 R1.2 | length 110.9
  Top Layer w10: R1.2 214.31,4783.01 230.78,4799.48 LED2.1
NetLED2_3: LED2.3 R2.2 | length 110.6
  Top Layer w10: R2.2 253.36,4717.52 254.69,4718.85 302.18,4718.85 LED2.3
NetR11_1: R11.1 U2.48 | length 215.2
  Top Layer w10: R11.1 1139,3597.92 U2.48
NetR12_2: R12.2 U2.64 | length 246.4
  Top Layer w10: U2.64 1599.14,3771.36 1599.14,3756.52 1674.51,3681.16 R12.2
P000: J2.26 U1.100 | length 65.7
  Top Layer w10: U1.100 1768.64,2460.87 1768.64,2485.28 1780.5,2497.14 v1(1780.5,2498.5)
P001: J2.27 U1.99 | length 93.6
  Top Layer w10: U1.99 1766.2,2431.7 1789.99,2455.49 1789.99,2478.99 v1(1815,2504)
P002: J4.9 U1.98 | length 1346.9
  Top Layer w10: U1.98@1786.27,2422.83 1786.27,2423.93 1806.72,2444.37 1806.72,2446.76 1807.99,2448.03 1807.99,2450.98 2153.01,2796 v1(2475,2796)
  Bottom Layer w10: v1(2475,2796) 2757,3078 J4.9
P003: J2.28 U1.97 | length 51.9
  Top Layer w10: U1.97 1826.26,2434.98 1826.26,2439.96 v1(1827.22,2440.92)
P004: C30.2 J2.29 POT1.2 U1.96 | length 66.4
  Top Layer w10: U1.96 1849.06,2429.93 1849.06,2436.91 v1(1850.01,2437.86)
P005: J4.10 U1.95 | length 1402.2
  Top Layer w10: U1.95 2199.96,2753 v1(2441,2753)
  Bottom Layer w10: v1(2441,2753) 2441,2810 2809,3178 J4.10
P006: J4.11 U1.94 | length 1472.9
  Top Layer w10: U1.94 2174.8,2700 v1(2401,2700)
  Bottom Layer w10: v1(2401,2700) 2401,2821 J4.11
P007: J4.12 U1.93 | length 1579.4
  Top Layer w10: U1.93 2145.64,2643 v1(2369,2643)
  Bottom Layer w10: v1(2369,2643) 2369,2889 J4.12
P008: J4.13 U1.92 | length 1663.2
  Top Layer w10: U1.92@1877.69,2348.31 1878.79,2348.31 2119.48,2589 v1(2336,2589)
  Bottom Layer w10: v1(2336,2589) 2336,2956 J4.13
P014: J2.21 U1.85 | length 83.3
  Top Layer w10: U1.85 1995,2269.65 v1(1995,2305)
P015: J1.20 U1.84 | length 3595.2
  Top Layer w10: J1.20 392,135 v1(427,170) ; U1.84 2049.04,2295.85 2049.04,2316.04 v1(2050,2317)
  Bottom Layer w10: v1(427,170) 427,611 863,1047 1548,1047 2111.5,1610.5 2111.5,2255.5 v1(2050,2317)
P100: J2.40 J5.3 U1.75 | length 53.1
  Top Layer w10: U1.75 2102.71,1997.33 2130.33,1997.33 v1(2132,1999)
P101: J2.39 J5.2 U1.74 | length 80.4
  Top Layer w10: v1@2012,2048 v1(2014,2048) 2024.19,2048 U1.74
P102: J2.38 J5.4 U1.73 | length 72.7
  Top Layer w10: v1(2002,2025) 2002.96,2024.04 2020.31,2024.04 U1.73
P103: J2.37 J5.1 U1.72 | length 165.8
  Top Layer w10: U1.72 2045.69,1971.92 2069.48,1948.14 2198.92,1948.14 v1(2200.06,1947)
P104: J3.20 J6.3 U1.71 | length 1113.6
  Top Layer w10: J6.3 856,272 v1(859,275) ; U1.71 2062.18,1926.5 2788.57,1926.5 2841.61,1979.54 2904.54,1979.54 J3.20
P105: J1.19 J6.2 U1.70 | length 3315.3
  Top Layer w10: J1.19 197.14,188.14 197.14,118.93 245.07,71 684.5,71 756,142.5 J6.2 756,257 v1(771,272) ; U1.70 2052.34,1908.5 2141.5,1908.5 v1(2167,1883)
  Bottom Layer w10: v1(771,272) 1243,744 1350,744 2169,1563 2169,1837.65 2159,1847.65 2159,1855.93 2166.04,1862.97 2166.04,1882.04 v1(2167,1883)
P106: J3.22 J6.4 U1.69 | length 2480.1
  Top Layer w10: J6.4 956,265 v1(959,268) ; U1.69 2093,1840 v1(2190,1840)
  Bottom Layer w10: v1(959,268) 959,395 1236,672 1329,672 2190,1533 v1(2190,1840)
P107: J3.19 J6.1 U1.68 | length 2571
  Top Layer w10: J6.1 656,245 v1(675,264) ; U1.68@1994.23,1912.03 1994.23,1910.93 2020.11,1885.05 2022.5,1885.05 2088.04,1819.5 v1(2148.5,1819.5)
  Bottom Layer w10: v1(675,264) 1173,762 1326,762 2149,1585 2149,1819 v1(2148.5,1819.5)
P108/TMS/SWDIO: J1.7 J10.2 R11.2 U1.51 | length 4172.8
  Top Layer w10: v1(52,1476) 55.5,1479.5 199.5,1479.5 J1.7 ; 693,3246 699.06,3252.06 729.06,3252.06 893.84,3416.84 R11.2 ; U1.51 1768.64,1663.26 1768.64,1593.36 v1(1787.59,1574.41)
  Bottom Layer w10: v1(52,1476) 52,2084 142,2174 220.01,2174 595.06,2549.05 595.06,2755.94 J10.2 ; J1.7 347,1538 1084.82,1538 1094.82,1528 1741.18,1528 v1(1787.59,1574.41)
P109/TDO: J1.4 J10.6 U1.52 U2.35 | length 1657.3
  Top Layer w10: U1.52 1803.55,1656.19 1803.55,1650.46 v1(1804.51,1649.5)
  Bottom Layer w10: J1.4 306,1735 393.27,1647.73 1097.33,1647.73 1099.1,1649.5 v1(1804.51,1649.5)
P110/TDI: J1.5 J10.8 U1.53 | length 1680.2
  Top Layer w10: U1.53 1828.54,1659.03 1828.54,1641.34 v1(1829.5,1640.38)
  Bottom Layer w10: J1.5 250,1629 1816.76,1629 1828.15,1640.38 v1(1829.5,1640.38)
P111: J1.3 U1.54 | length 1742.2
  Top Layer w10: U1.54 1844.13,1671.28 v1(1845.28,1671.28)
  Bottom Layer w10: J1.3 409,1670 1817.78,1670 1819.07,1671.28 v1(1845.28,1671.28)
P112: J3.8 R5.1 U1.55 | length 637.7
  Top Layer w10: R5.1 1700.49,1191.88 1704.84,1196.23 1704.84,1196.72 1865.78,1357.67 1865.78,1679.78 1846.52,1699.04 1844.22,1699.04 U1.55
P113: J3.33 U1.56 | length 1416.8
  Top Layer w10: U1.56 2736.09,835 J3.33
P114: J3.9 U1.57 | length 1494.3
  Top Layer w10: U1.57@1842.42,1755.42 1843.52,1755.42 2708.43,890.5 2878.43,890.5 2913.5,925.58 2950.58,925.58 J3.9
P115: J3.32 U1.58 | length 1359.1
  Top Layer w10: U1.58 2691.77,935 J3.32
P200: J1.22 R7.1 U1.40 | length 2454.3
  Top Layer w10: J1.22 153.42,244.42 190.5,244.42 236.58,290.5 319.5,290.5 513,484 v1(517,484) ; R7.1 v1(1333,996) 1333,1635.49 U1.40
  Bottom Layer w10: v1(517,484) 821,484 v1(1333,996)
P201/MD: J1.23 J8.1 U1.39 | length 2706.5
  Top Layer w10: v1(1785,891) 1824,852 J8.1
  Bottom Layer w10: J1.23 71,262 71,100 108,63 1346.14,63 1352,68.86 1352,521 1722,891 v1(1785,891)
P205: C12.1 J2.34 J4.36 U1.32 | length 272.9
  Top Layer w15: C12.1@1181.34,1807.99 C12.1 1259.06,1804.86 1338.44,1884.24 1384.44,1909.63 U1.32
P206: J4.35 U1.31
P207: J1.37 R4.1 U1.30 | length 1630.9
  Top Layer w10: J1.37 153.42,1744.42 190.5,1744.42 233.07,1787 290,1787 422,1919 709,1919 ; R4.1 615,1730.01 711.86,1826.87 711.86,1835.15 709,1838.01 709,1919 ; U1.30 1338.12,1919 709,1919
P208: J4.33 U1.37
P209: J4.29 U1.36
P210: J4.30 U1.35
P211: J4.32 U1.34
P212/EXTAL: C14.2 J2.10 U1.14 X1.3 | length 777.1
  Top Layer w10: C14.2 854.72,2313.4 X1.3 859.39,2313.4 859.39,2279.45 865.24,2273.59 1142.42,2273.59 1172.5,2303.67 1434.45,2303.67 U1.14
P213/XTAL: C13.2 J2.11 U1.13 X1.1 | length 804.3
  Top Layer w10: C13.2 768.51,2410.8 770.99,2413.28 771.38,2413.28 803.51,2445.4 881.66,2445.4 942.06,2385 X1.1 949.94,2385 1004.78,2330.15 1435.81,2330.15 U1.13
P214: J4.31 U1.33
P300/TCK/SWCLK: J1.16 J10.4 R12.1 U1.50 | length 3339
  Top Layer w10: J1.16 602,893 v1(602,1157) ; 693,3196 1229.67,3196 1674.51,3640.84 R12.1 ; v1(1473,1271) 1611.38,1409.38 1611.38,1635.48 U1.50
  Bottom Layer w10: v1(602,1157) 1359,1157 v1(1473,1271)
P301: J1.13 U1.49 | length 1936.5
  Top Layer w10: J1.13 386,977 v1(386,1231) ; v1(1464,1505) 1511.99,1505 1593.38,1586.39 1593.38,1645.32 U1.49
  Bottom Layer w10: v1(386,1231) 578,1231 587,1240 981,1240 1246,1505 v1(1464,1505)
P302: J1.6 U1.48 | length 1489
  Top Layer w10: v1(1557,1579) 1557,1636.78 U1.48
  Bottom Layer w10: J1.6 288,1579 v1(1557,1579)
P303: J3.7 U1.47
P304: J3.35 J5.7 U1.44
P305: J3.6 U1.43
P306: J3.36 U1.42
P307: J3.5 U1.41
P400: J1.1 U1.1 | length 1731.6
  Top Layer w10: v1(1528.09,2558.58) 1529.45,2558.58 1538.98,2549.04 1550.99,2549.04 U1.1
  Bottom Layer w10: J1.1 416,2207 1065.01,2207 1474.66,2616.65 1483.38,2616.65 1527.14,2572.9 1527.14,2559.53 v1(1528.09,2558.58)
P401: J1.2 U1.2 | length 1743.9
  Top Layer w10: v1(1525.68,2532) 1526.63,2531.04 1541.15,2531.04 U1.2
  Bottom Layer w10: J1.2 244,1938 489,2183 1070,2183 1475.45,2588.45 1483.74,2588.45 1503.89,2568.3 1503.89,2553.79 v1(1525.68,2532)
P402: J1.36 J5.9 U1.3 | length 2056.5
  Top Layer w10: J1.36 199.5,1690.5 304.5,1690.5 v1(383,1769) ; v1(1543.48,2499.72) 1544.06,2499.72 1627.1,2416.68 U1.3
  Bottom Layer w10: v1(383,1769) 383,2014 503,2134 1063.81,2134 1472.26,2542.45 1488.54,2542.45 1505.18,2525.81 1505.18,2523.51 1517.19,2511.5 1530.35,2511.5 1542.13,2499.72 v1(1543.48,2499.72)
P403: J1.17 U1.4 | length 2908.4
  Top Layer w10: J1.17 194,485 194,947.93 228.32,982.25 254.17,982.25 347,1075.07 347,1491 v1(630,1774) ; v1(1486,2516) 1512.26,2489.74 1524.47,2489.74 1569.31,2444.9 1571.62,2444.9 U1.4
  Bottom Layer w10: v1(630,1774) 648,1756 726,1756 v1(1486,2516)
P404: J1.34 J5.8 U1.5 | length 2455
  Top Layer w10: v1(1361.14,2627.27) 1361,2627.13 1361,2612.01 1516.34,2456.67 1532.01,2456.67 U1.5
  Bottom Layer w10: J1.34 188.5,1479.5 188.5,2060.87 221.62,2094 255,2094 409,2248 1079,2248 1361.14,2530.14 v1(1361.14,2627.27)
P405: J1.33 J5.10 U1.6 | length 2614.1
  Top Layer w10: v1(1329,2609) 1499.33,2438.67 1522.17,2438.67 U1.6
  Bottom Layer w10: J1.33 99.5,1379.5 99.5,2076.65 137.86,2115 250.54,2115 413.54,2278 1083.54,2278 1329,2523.46 v1(1329,2609)
P406: J1.32 U1.7 | length 2717.5
  Top Layer w10: v1(1305.16,2601.16) 1394.11,2512.2 1394.11,2508.67 1482.11,2420.67 1512.33,2420.67 U1.7
  Bottom Layer w10: J1.32 134.58,1244.42 134.58,1281.5 81.5,1334.57 81.5,2084.1 141.4,2144 250,2144 407.5,2301.5 1067.5,2301.5 1279,2513 1279,2575 v1(1305.16,2601.16)
P407: C22.1 J2.30 RA1.1 RA1.2 RA1.3 U1.25 | length 1292.3
  Top Layer w10: v1(300,2347) 535.41,2111.59 1288.6,2111.59 1303.81,2126.81 1305.09,2126.81 U1.25 ; C22.1 2395.13,4417.06 2395.13,4529.5 RA1.1 RA1.2 RA1.3
P408: J2.33 U1.24 | length 1115.9
  Top Layer w10: v1(332,2359) 561.41,2129.59 1202.06,2129.59 1220.63,2148.16 1310.48,2148.16 1334.27,2124.37 U1.24
P409: J2.32 U1.23 | length 1099.2
  Top Layer w10: v1(361,2369) 582.41,2147.59 1194.61,2147.59 1213.17,2166.16 1320.32,2166.16 1348.19,2138.29 U1.23
P410: J4.34 U1.22 | length 99.4
  Top Layer w10: U1.22 1364.31,2152.21 1388.1,2128.42 1443.42,2128.42 v1(1450,2135)
P411: J2.31 U1.21 | length 1045.5
  Top Layer w10: v1(430,2355) 619.41,2165.59 1187.15,2165.59 1211.48,2189.92 1352.24,2189.92 1376.03,2166.13 U1.21
P412: J2.1 U1.20 | length 988.5
  Top Layer w10: v1(489,2340) 645.41,2183.59 1179.7,2183.59 1204.02,2207.92 1362.08,2207.92 1389.95,2180.05 U1.20
P413: J2.2 U1.19 | length 947
  Top Layer w10: v1(537,2336) 671.41,2201.59 1172.24,2201.59 1196.57,2225.92 1373.02,2225.92 U1.19
P414: J1.18 U1.18 | length 87.8
  Top Layer w10: U1.18 1419.99,2207.89 1443.78,2184.1 1494.1,2184.1 v1(1496,2186)
P415: J2.3 R3.1 S1.1 S1.3 U1.17 | length 1239.6
  Top Layer w10: v1(592,2326) 698.41,2219.59 1164.78,2219.59 1194.87,2249.67 1403.84,2249.67 1431.7,2221.81 U1.17 ; S1.3 700.42,771.5 S1.1@862.58,771.5 ; S1.1 S1.1@862.58,771.5 ; R3.1@870,900.75 870,845.97 862.58,838.55 S1.1@862.58,771.5
P500: J4.1 U1.76 | length 841.1
  Top Layer w10: U1.76 2149.9,2174 2152,2174 2256,2278 J4.1
P501: J4.2 U1.77 | length 908.5
  Top Layer w10: U1.77@2059.48,2112.52 2060.58,2112.52 U1.77 2326.06,2378 J4.2
P502: J4.3 U1.78 | length 940.2
  Top Layer w10: U1.78 2398.22,2478 J4.3
P503: J4.4 U1.79 | length 989.8
  Top Layer w10: U1.79 2470.38,2578 J4.4
P504: J4.5 U1.80 | length 1039.4
  Top Layer w10: U1.80 2542.54,2678 J4.5
P508: J4.6 U1.81 | length 1088.9
  Top Layer w10: U1.81 2614.71,2778 J4.6
P600: J1.12 U1.67 | length 2406.7
  Top Layer w10: U1.67 2010.27,1867.05 2015.04,1867.05 2060.32,1821.77 2060.32,1818.23 v1(2061.28,1817.28)
  Bottom Layer w10: J1.12 379,1070 1456.89,1070 2081,1694.11 2081,1798.11 2061.83,1817.28 v1(2061.28,1817.28)
P601: J1.10 U1.66 | length 2227.7
  Top Layer w10: U1.66 2001.98,1847.51 2005.59,1847.51 v1(2006.55,1846.55)
  Bottom Layer w10: J1.10 1470.98,1135 2012,1676.02 2012,1757.88 2006.55,1763.33 v1(2006.55,1846.55)
P602: J1.11 U1.65 | length 2318.6
  Top Layer w10: U1.65 2011.69,1809.96 2033.04,1809.96 v1(2034,1809)
  Bottom Layer w10: J1.11 310,1101 1462.44,1101 2051,1689.56 2051,1792 v1(2034,1809)
P608: J3.10 U1.59 | length 1409.5
  Top Layer w10: U1.59 2564.11,1090.5 2867.42,1090.5 2913.5,1044.42 2950.58,1044.42 J3.10
P609: J1.15 U1.60 | length 2458.8
  Top Layer w10: J1.15 539,930 v1(539,1179) ; U1.60 1970.45,1712 v1(1973,1712)
  Bottom Layer w10: v1(539,1179) 1187,1179 1420,1412 1679.63,1412 1885.7,1618.07 1885.7,1624.7 v1(1973,1712)
P610: J1.14 U1.61 | length 2408.7
  Top Layer w10: J1.14 253.42,744.42 253.42,781.5 485,1013.07 v1(485,1201) ; U1.61 1959.29,1751 v1(1977,1751)
  Bottom Layer w10: v1(485,1201) 992,1201 1275,1484 1726.17,1484 1867.7,1625.53 1867.7,1632.15 1934,1698.46 1934,1708 v1(1977,1751)
P708: J2.4 U1.16 | length 865.4
  Top Layer w10: v1(642,2322) 726.41,2237.59 1157.33,2237.59 1187.41,2267.67 1414.78,2267.67 U1.16
RES: J1.24 J10.10 R6.1 S2.1 S2.3 U1.38 U2.46 | length 3721
  Top Layer w10: J1.24 155.12,435 182.44,407.68 196.77,407.68 213.95,390.5 316.5,390.5 498,572 752.57,572 934.07,753.5 S2.3 ; v1(1032,3539) 1032,3540.84 1123.21,3632.05 1123.21,3637.81 U2.46 ; S2.1 S2.3 ; U1.38 1236,1594.17 R6.1 1185.64,944.64 1162,921 1162,806.83 1210.42,758.42 S2.3
  Bottom Layer w10: J10.10 792,3385 1032,3385 v1(1032,3539)
TS_CONN: C33.2 R4.2 TS1.2 | length 265.5
  Top Layer w10: TS1.2 612.79,1593.22 R4.2 616.74,1597.17 C33.2
USBMCU_N: FL1.1 J1.40 U1.27 | length 1256.5
  Top Layer w10: J1.40 188.5,2079.5 391.5,2079.5 495,1976 1289.46,1976 ; 1289.48,1975.98 1310.48,1975.98 U1.27@1330.75,1996.25
USBMCU_P: FL1.4 J1.39 U1.28 | length 1244.5
  Top Layer w10: J1.39 188.86,1979.86 372.14,1979.86 394.02,1957.98 1321.42,1957.98 U1.28
VCL: C51.2 J3.26 U1.64 | length 1061.6
  Top Layer w10: U1.64 2005.31,1788.5 2225.5,1788.5 2245,1769 2626,1769 J3.26
VCL0: C17.2 J2.14 U1.9 | length 508.3
  Top Layer w10: C17.2 1263,2614.32 U1.9
VSS_3: C4.1 U1.63
XCIN: C15.1 J2.13 U1.10 X2.1 | length 681
  Top Layer w10: C15.1 1127.58,2789.65 1127.58,2764.19 1120.21,2756.82 X2.1 1156.87,2700.48 1234.48,2622.88 1234.48,2590.53 1312.08,2512.92 1315.62,2512.92 1425.87,2402.67 1446.81,2402.67 U1.10
XOUT: C16.1 U1.11 X2.2 | length 733.8
  Top Layer w10: C16.1 1017.37,2696.07 X2.2 1021.79,2696.07 1021.79,2684.74 1038.44,2668.08 1075.17,2668.08 1248.33,2494.92 1308.16,2494.92 1418.42,2384.67 1436.97,2384.67 U1.11@1506.27,2315.37
pads on no net: J1.21 J1.25 J1.26 J1.27 J1.28 J1.29 J1.30 J1.31 J1.35 J2.5 J2.6 J2.7 J2.8 J2.9 J2.12 J2.16 J2.17 J2.18 J2.19 J2.20 J3.1 J3.2 J3.3 J3.4 J3.11 J3.12 J3.13 J3.14 J3.15 J3.16 J3.17 J3.18 J3.21 J3.23 J3.24 J3.25 J3.27 J3.28 J3.29 J3.30 J3.31 J3.34 J3.37 J3.38 J3.39 J3.40 J4.7 J4.8 J4.15 J4.16 J4.17 J4.18 J4.20 J4.21 J4.22 J4.24 J4.25 J4.26 J4.28 J4.37 J4.38 J4.39 J4.40 J8.4 J10.7 J11.4 J12.6 RA1.4 RA2.1 TS1.1 U2.1 U2.2 U2.3 U2.4 U2.6 U2.7 U2.9 U2.10 U2.12 U2.13 U2.14 U2.15 U2.22 U2.23 U2.24 U2.26 U2.27 U2.28 U2.29 U2.30 U2.31 U2.34 U2.36 U2.37 U2.38 U2.41 U2.42 U2.43 U2.44 U2.47 U2.49 U2.50 U2.51 U2.52 U2.53 U2.54 U2.55 U2.58 U2.59 U2.60 U2.61 U2.62 U2.63
copper on no net: | length 16201.1
  Top Layer w10: 7323,6948.47 7323,7007.53 ; 0,0 0,4921 3150,4921 3150,0 0,0

## Text inside footprints (layer, text, board x,y; h text height)
J5: Top Overlay "7" at 2641,180 h40 r180; Top Overlay "1" at 2641,280 h40 r180; Top Overlay "6" at 1961,280 h40 r180; Top Overlay "12" at 1961,180 h40 r180
J8: Top Overlay "3" at 1853,692 h40 r270; Top Overlay "4" at 1953,692 h40 r270; Top Overlay "2" at 1953,952 h40 r270; Top Overlay "1" at 1853,932 h40 r270
J12: Top Overlay "6" at 574,3469 h40 r270; Top Overlay "5" at 474,3469 h40 r270; Top Overlay "2" at 574,3829 h40 r270; Top Overlay "1" at 474,3809 h40 r270